# Altium PCB OGS_Headstage_tiny.PcbDoc
Units mil, origin at the board's own origin, x right, y up, seen from the top; angles counter-clockwise.
Board outline 483 x 345 mil, 4 copper layers (Top Layer, Ground 1, Power 2, Bottom Layer), stack 33.1 mil thick; 33 components, 30 nets, 127 pads, 31 vias.
Unrouted connection lines stored in the file: 6.
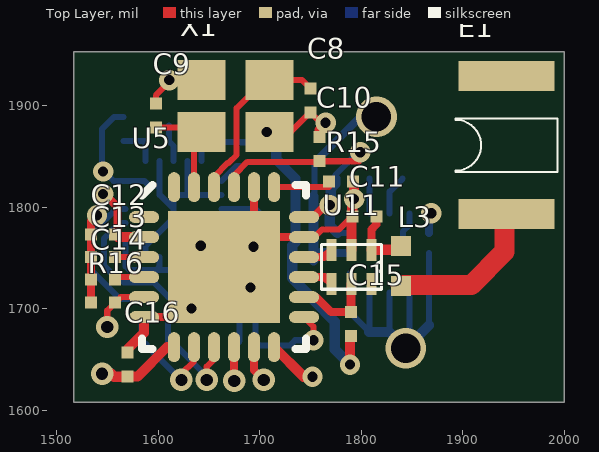
[diagram p0: Top Layer view]
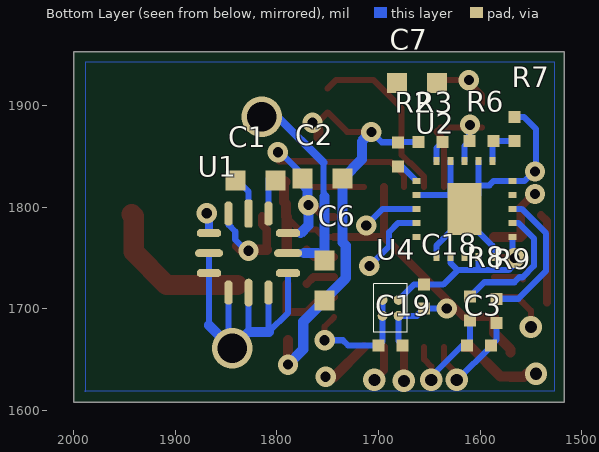
[diagram p1: Bottom Layer view, seen from below]
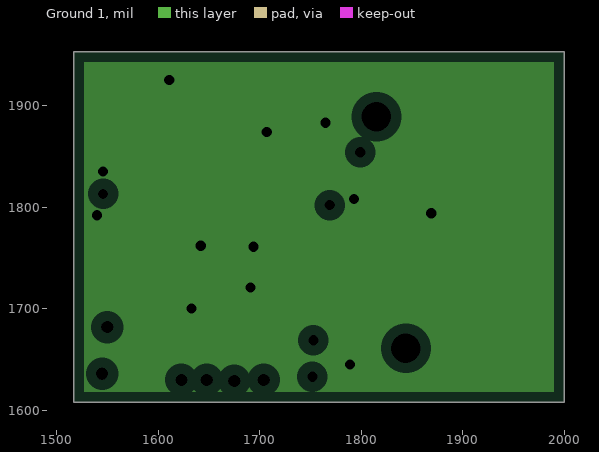
[diagram p2: Ground 1, clearances drawn from the general rule]
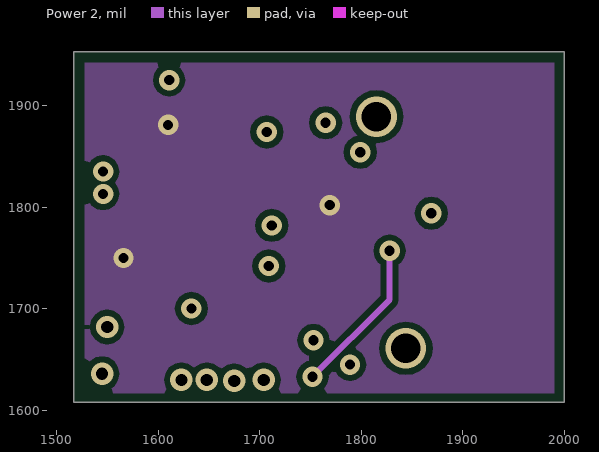
[diagram p3: Power 2]

## Layer stack, top to bottom
Top Layer: signal copper 2.1
Dielectric: core 3.5, FR-4, Dk 4.8
Ground 1: plane copper 1.4, net GND
Dielectric: prepreg 10, FR-4, Dk 4.8
Power 2: signal copper 1.4
Dielectric: core 12.6, FR-4, Dk 4.8
Bottom Layer: signal copper 2.1

## Board outline
1517,1608 1517,1953 2000,1953 2000,1608

## Design rules (kind name [scope] priority, off if disabled: settings)
Clearance clearance1 [All] p1: gap=6
ComponentClearance [All] p1: gap=6 collisioncheckmode=3 verticalgap=0 showdistances=TRUE
Height [All] p1 off: minheight=0 maxheight=1000 prefheight=500
HoleSize [All] p1: absolutevalues=TRUE maxlimit=100 minlimit=10 maxpercent=80.000 minpercent=20.000
HoleToHoleClearance [All] p1: gap=6 allowstackedmicrovias=TRUE
MinimumSolderMaskSliver [All] p1: minsoldermaskwidth=3
PlaneClearance [All] p1: clearance=10
PlaneConnect [All] p1: planeconnectstyle=Direct reliefexpansion=20 reliefentries=4 reliefconductorwidth=10 reliefairgap=10
PolygonConnect PowerConnect [All vs Not OnOutside] p1: connectstyle=Direct reliefconductorwidth=10 reliefentries=4 polygonreliefangle="90 Angle"
PolygonConnect [All] p2: connectstyle=Relief reliefconductorwidth=10 reliefentries=4 polygonreliefangle="90 Angle"
RoomDefinition SingleASIC [InComponentClass('SingleASIC')] p1 off: confinementstyle=ConfineIn formatcopy=TRUE lockcomponents=FALSE outline 2187,484 3662,484 3662,699 2187,699
RoomDefinition Main_4x4 [InComponentClass('Main_4x4')] p2 off: confinementstyle=ConfineIn formatcopy=TRUE lockcomponents=FALSE outline 0,0 2000,0 2000,1000 0,1000
RoomDefinition LED_SOP [InComponentClass('LED_SOP')] p3 off: confinementstyle=ConfineIn formatcopy=TRUE lockcomponents=FALSE outline 2666,913 2951,913 2951,1048 2666,1048
RoutingCorners [All] p1: cornerstyle=45-Degree minsetback=20 maxsetback=20
RoutingVias [All] p1: holewidth=12 width=22 viastyle="Through Hole" minholewidth=12 minwidth=22 maxholewidth=30 maxwidth=50
ShortCircuit [All] p1: allowed=TRUE
SilkscreenOverComponentPads [OnLayer('Mechanical 13') vs OnLayer('Mechanical 15')] p1: minsilkscreentomaskgap=10
SolderMaskExpansion [All] p1: expansion=0
Width Width_v3p0 [InNet('V3P0')] p1: maxlimit=50 minlimit=6 preferedwidth=10
Width [All] p2: maxlimit=30 minlimit=6 preferedwidth=6
18 further rules are at their usual default settings.

## Classes and differential pairs
component class LED_SOP: C1 C2 C6 LED1 U1
component class Main_4x4: C7 C8 C9 C10 C11 C12 C13 C14 C15 C16 C? E1 L3 R15 R16 U5 U11 X1
component class SingleASIC: C3 C18 C19 R2 R3 R6 R7 R8 R9 U2 U4

## Components (designator, comment, footprint, x,y, rotation, side; value= is the part's Value field where it differs from the comment)
C1 "NP0 50V" 0402l 1821,1826 r0 bottom
C2 "NP0 50V" 0402l 1755,1828 r0 bottom
C3 "NP0 50V" 0201 1601,1664 r180 bottom
C6 "NP0 50V" 0402l 1753,1728 r270 bottom
C7 "NP0 50V" 0402l 1662,1922 r180 bottom
C8 "NP0 50V" 0201 1750,1905 r90 top
C9 "NP0 50V" 0201 1598,1890 r90 top
C10 "NP0 50V" 0201 1759,1857 r90 top
C11 "NP0 50V" 0201 1803,1791 r0 top
C12 "NP0 50V" 0201 1546,1773 r180 top
C13 "NP0 50V" 0201 1546,1751 r0 top
C14 "NP0 50V" 0201 1546,1729 r180 top
C15 "NP0 50V" 0201 1790,1685 r270 top
C16 "NP0 50V" 0201 1570,1645 r270 top
C18 "NP0 50V" 0201 1655,1712 r270 bottom
C19 "NP0 50V" 0201 1688,1664 r180 bottom
E1 "MicroAntenna" microantenna 1943,1793 r90 top
L3 "Inductor" 0402l 1839,1742 r270 top
LED1 "osram_hiled" "OSRAM LED" 2202,1715 r270 bottom
R2 "Res2" 0201 1681,1852 r90 bottom
R3 "Res2" 0201 1649,1864 r0 bottom
R6 "Res2" 0201 1598.81,1865 r0 bottom
R7 "Res2" 0201 1566,1877 r270 bottom
R8 "Res2" 0201 1610,1700 r90 bottom
R9 "Res2" 0201 1584,1698 r90 bottom
R15 "Res2" 0201 1780,1825 r0 top
R16 "Res2" 0201 1546,1706 r0 top
U1 "ZLED7022" 12utqfn 1789,1735 r0 bottom
U2 "Single_ASIC" Single_ASIC 1643,1751 r90 bottom
U4 "TPS72715YFFT" "TI YFF WLCSP-4.4" 1696,1693 r90 bottom
U5 "QFN24 4x4 package" NORDIC_QFN50P400X400X90-25N 1665,1741 r0 top
U11 "balun" balun 1810,1758 r270 top
X1 "TSX-3225, 16MHz, Cl=9pF, +/-10ppm" "bt-xtal 2.5 x 2 mm" 1643,1874 r0 top

## Footprints (in the part's own frame and the unit in brackets; to place one, negate y for a bottom-side part, rotate by r counter-clockwise, add the part's x,y. Pads: shape width x height; smd on the part's side, far side on the other; paste and mask are expansions set on the pad)
12utqfn [mm]
  oct 0.6x0.2 smd: 1(0,0) 3(0,-1) 7(1.975,-1) 9(1.975,0)
  oval 0.7x0.2 smd: 2(0,-0.5) 8(1.975,-0.5)
  oct 0.2x0.6 smd: 4(0.487,-1.487) 6(1.487,-1.487) 10(1.487,0.487) 12(0.487,0.487)
  rrect50% 0.2x0.7 smd: 5(0.987,-1.487)
  oval 0.2x0.7 smd: 11(0.987,0.487)
  body extent -0.04,-1.53 2.01,0.52, height 0.6
0201 [mm]
  rect 0.3x0.3 smd: 1(-0.3,0) 2(0.3,0)
  body extent -0.3,-0.15 0.3,0.15, height 0.3
0402l [mm]
  rect 0.5x0.5 smd: 1(-0.5,0) 2(0.5,0)
  body extent -0.5,-0.25 0.5,0.25, height 0.3
balun [mm]
  rect 0.55x0.25 smd: 1(0,0) 2(0,-0.5) 3(0,-1) 4(0.85,-1) 5(0.85,-0.5) 6(0.85,0)
  silkscreen extent -0.14,-1.25 0.99,0.25, body extent -0.14,-1.25 0.99,0.25, height 0.6
"bt-xtal 2.5 x 2 mm" [mm] "Mercury X32 series"
  rect 1.2x1 smd: 1(0,0) 2(1.7,0) 3(1.7,1.3) 4(0,1.3)
  body extent -0.4,-0.35 2.1,1.65, height 0.65
microantenna [mm]
  rect 0.75x2.4 smd: 1(0,0) 2(3.45,0)
  silkscreen extent 1.06,-1.27 2.39,1.27, body extent -0.2,-1.05 3.6,1.05, height 0.6
NORDIC_QFN50P400X400X90-25N [mm] "QFN24 4x4x0.85mm, 0.5mm pitch - Medium Density"
  oval 0.75x0.3 smd: 1(-2,1.25) 2(-2,0.75) 3(-2,0.25) 4(-2,-0.25) 5(-2,-0.75) 6(-2,-1.25) 13(2,-1.25) 14(2,-0.75) 15(2,-0.25) 16(2,0.25) 17(2,0.75) 18(2,1.25)
  oval 0.3x0.75 smd: 7(-1.25,-2) 8(-0.75,-2) 9(-0.25,-2) 10(0.25,-2) 11(0.75,-2) 12(1.25,-2) 19(1.25,2) 20(0.75,2) 21(0.25,2) 22(-0.25,2) 23(-0.75,2) 24(-1.25,2)
  rect 2.8x2.8 smd: 25(0,0)
  silkscreen extent -2.05,-2.05 2.05,2.05, body extent -2.05,-2.05 2.05,2.05, height 0.9
"OSRAM LED" [mm]
  round 2.167 hole 2.067: 0(0,0)
  rect 0.5x1.5 smd: 1(-2.05,0) 2(2.05,0)
Single_ASIC [mm]
  rect 0.152x0.2 smd: 1(0.5,0.5) 2(0.85,0.5) 3(1.2,0.5) 4(1.55,0.5) 5(1.9,0.5) 11(1.9,-1.9) 12(1.55,-1.9) 13(1.2,-1.9) 14(0.85,-1.9) 15(0.5,-1.9)
  rect 0.2x0.152 smd: 6(2.4,0) 7(2.4,-0.35) 8(2.4,-0.7) 9(2.4,-1.05) 10(2.4,-1.4) 16(0,-1.4) 17(0,-1.05) 18(0,-0.7) 19(0,-0.35) 20(0,0)
  rect 1.3x0.85 smd: 21(1.2,-0.7)
"TI YFF WLCSP-4.4" [mm]
  round 0.248 smd: A1(0,0) A2(0.4,0) B1(0,-0.4) B2(0.4,-0.4)
  silkscreen extent -0.41,-0.62 0.8,0.22, body extent -0.41,-0.62 0.8,0.22, height 0.63

## Part data
C1 C2 C3 C6 C7 C8 C9 C10 C11 C12 C13 C14 C15 C16 C18 C19: library part Cap, "Capacitor"
R2 R3 R6 R7 R8 R9 R15 R16: "Resistor"
U1: "ZLED 7022"
U4: "IC REG LDO 250MA 1.5V 4-DSBGA"
U5: library part "nRF24LE1 - 4x4", "2.4GHz Tranceiver with embedded MCU and 10 bit ADC"
X1: library part BT-XTAL, "Crystal"

## Via types
v1: diameter 20, hole 10, Top Layer to Bottom Layer, 12 vias
v2: diameter 22, hole 12, Top Layer to Bottom Layer, 6 vias
v3: diameter 20, hole 10, Power 2 to Bottom Layer, 5 vias
v4: diameter 20, hole 10, Top Layer to Ground 1, 5 vias
v5: diameter 40, hole 29, Top Layer to Bottom Layer, 2 vias
v6: diameter 22, hole 11.8, Top Layer to Bottom Layer, 1 vias

## Nets (pads, with @x,y where several pads share a name; then routed paths per layer and width w, separated by ;. In a path a pad name is that pad's centre, name@x,y a point inside that pad or via, vN(x,y) a via of type N, cw(c..) or ccw(c..) an arc to the next point about the centre after c; other vN are vias at no path point)
ADC+: C3.1 R8.1 U5.9 | length 111.8
  Top Layer w6: v2(1648,1630) 1648,1643 1655.16,1650.16 U5.9
  Bottom Layer w6: R8.1 1610,1666.81 C3.1 1617.28,1664 1648,1633.28 v2(1648,1630)
ADC-: C3.2 R9.1 U5.8 | length 104.2
  Top Layer w6: v2@1623,1636 1635.47,1648.47 U5.8
  Bottom Layer w6: R9.1 1584,1669.19 C3.2 1589.19,1663.08 1622.27,1630 v2(1623,1630)
ELEC: U2.3 | length 56
  Bottom Layer w6: U2.3 1695.76,1798.24 v3(1712,1782)
ELEC_REF: U2.2 | length 72.1
  Bottom Layer w6: U2.2 1680.54,1784.46 1689.5,1775.5 1689.5,1761.5 v3(1709,1742)
FCSN: U5.11 | length 36.2
  Top Layer w8: U5.11 1694.53,1639.47 v2(1704,1630)
FMISO: U5.10 | length 33.3
  Top Layer w8: U5.10 1674.84,1629.16 v2(1675,1629)
GND: C2.1 C6.2 C8.1 C9.2 C10.2 C11.1 C12.2 C13.1 C14.2 C15.2 C16.1 C18.2 C19.2 R2.2 R3.2 R7.1 R15.2 R16.1 U1.7 U2.4 U2.7 U2.9 U2.11 U2.16 U2.20 U2.21 U4.B1 U5.6 U5.17 U5.20 U5.25 U11.2 X1.2 X1.4 | length 1461.6
  Top Layer w6: C9.2 1598,1910 1613.18,1925.18 X1.4 ; X1.2 1730.81,1874 C8.1 1760.19,1883 v1(1765,1883) ; U5.17 1753.99,1770.53 1761.29,1777.83 1778.02,1777.83 1790.32,1790.13 C11.1
  Top Layer w8: R16.1 C14.2 C13.1 C12.2 1534.19,1786.19 v4(1540,1792) ; U5.6 1615.79,1691.79 U5.25 U5.25@1694.53,1770.53 ; U5.20 U5.25@1694.53,1770.53 ; U5.17 U5.25@1694.53,1770.53
  Top Layer w10: C16.1 1570,1660 1586.26,1676.26 U5.6 ; C10.2 1759,1875.81 v1@1763.19,1880 ; v1@1764.7,1880 v1@1763.19,1880 ; v1@1765,1881.81 v1@1763.19,1880 ; v1(1789,1645) C15.2@1789,1669.19 ; U11.2 C11.1@1790.32,1790.13 ; C11.1 1791.19,1803.19 v4@1793,1805 ; R15.2 1793,1823.81 v4(1793,1808)
  Bottom Layer w6: R7.1 1556.81,1888.81 1545,1877 1545,1837 1556.2,1825.8 U2.11 1586.54,1825.8 1591,1821.34 U2.21@1601.66,1821.34 ; U2.16 1587.88,1762.16 U2.21@1615.44,1789.72 ; U2.9 U2.21@1601.66,1821.34 ; U2.7 U2.21@1629.22,1812.02 ; v1@1630,1703 v1(1632.81,1700.19) C18.2 1662.19,1693 U4.B1 1680.25,1668.06 C19.2 ; U2.20 1643,1762 1615.44,1789.56 U2.21@1615.44,1789.72 ; R3.2 1680.81,1864 R2.2 1696.81,1863.81 v1(1707,1874) ; U2.4 U2.21@1629.22,1812.02 ; U2.21@1601.66,1821.34 1601.66,1812.02 U2.21 ; U2.21@1615.44,1789.72 U2.21 ; U2.21 1615.44,1812.02 U2.21@1629.22,1812.02
  Bottom Layer w8: U1.7 1866.76,1788.76 v1@1869,1791
  Bottom Layer w10: v1(1707,1874) 1716.32,1864.68 1716.32,1847 C2.1 1735.32,1765.24 1732.16,1762.08 1732.16,1730.13 1753,1709.29 C6.2 1774,1687.32 1774,1660 v1(1789,1645)
  other v1: 1869,1794 1546,1835 1611,1925
  other v4: 1691,1721 1694,1761 1642,1762
LED_CTRL: U1.6 U5.12 | length 245
  Top Layer w10: U5.12 1743.47,1633 v1(1752,1633)
  Power 2 w6: v1(1752,1633) 1828,1709 v3(1828,1757)
  Bottom Layer w6: v3@1833,1760 1841,1768 1841,1776 1847.56,1782.56 U1.6
NetC1_1: C1.1 U1.4 | length 34.4
  Bottom Layer w6: U1.4 C1.1@1808.19,1828
NetC1_2: C1.2 U1.5 | length 39.7
  Bottom Layer w6: U1.5 1827.88,1815.19 C1.2@1840.68,1828
NetC8_2: C8.2 U5.22 X1.3 | length 175
  Top Layer w6: U5.22 1655.16,1829.99 1668.67,1843.5 1669.5,1843.5 1677.31,1851.31 1677.31,1897.41 1705.08,1925.18 X1.3 1741.63,1925.18 C8.2
NetC9_1: C9.1 U5.23 X1.1 | length 104.1
  Top Layer w6: C9.1 1638.81,1878.19 X1.1 1635.47,1866.47 U5.23
NetC11_2: C11.2 L3.1 U11.1 | length 65.5
  Top Layer w8: U11.1 1810,1778 1814.81,1782.81 C11.2
  Top Layer w10: U11.1 1835.32,1758 L3.1
NetC13_2: C13.2 U5.3 | length 28.5
  Top Layer w6: C13.2 1557.97,1750.84 U5.3
NetC14_1: C14.1 U5.4 | length 29.3
  Top Layer w6: C14.1 1559.97,1731.16 U5.4
NetC15_1: C15.1 U5.14 U11.5 | length 79.7
  Top Layer w8: U5.14 1755.53,1711.47 1770.19,1696.81 C15.1
  Top Layer w9: C15.1 U11.5@1790,1724.22
NetE1_1: E1.1 L3.2 | length 153.4
  Top Layer w20: L3.2@1839,1723.32 1908.32,1723.32 1941,1756 1941,1791 E1.1
NetLED1_1: LED1.1 U1.1 U1.8 U1.9 U1.10 U1.11 U1.12 | length 340.5
  Bottom Layer w6: U1.1 1789,1696 1807.88,1677.12 ; 1808.19,1676.81 U1.12 ; 1827.88,1677.12 U1.11 ; v5(1844,1661) 1847.56,1664.56 U1.10 ; 1866.76,1683.76 U1.9 U1.8
  Bottom Layer w10: 1807.88,1677.12 1827.88,1677.12 v5(1844,1661) ; v5@1847.56,1664.56 1866.76,1683.76
NetR2_1: R2.1 U2.5 | length 24.3
  Bottom Layer w6: U2.5 1677.07,1840.19 R2.1
NetR3_1: R3.1 U2.6 | length 20.9
  Bottom Layer w6: R3.1 1643,1858.19 U2.6
NetR6_1: R6.1 R7.2 U2.10 | length 41
  Bottom Layer w6: R7.2 1566.19,1865 R6.1 1587.88,1864.12 U2.10
NetR8_2: R8.2 U2.14 | length 130.1
  Bottom Layer w6: U2.14 1562.31,1784.46 1547,1769.15 1547,1742.13 1558.13,1731 1561.35,1731 1566.28,1726.06 1595.75,1726.06 R8.2
NetR9_2: R9.2 U2.13 | length 140.5
  Bottom Layer w6: U2.13 1559.12,1798.24 1535,1774.12 1535,1737.16 1562.35,1709.81 R9.2
NetR15_1: R15.1 U5.19 | length 54
  Top Layer w6: U5.19 R15.1@1768.19,1819.74
NetR16_2: R16.2 U5.5 | length 56
  Top Layer w6: v2@1550,1684 1550,1698.19 R16.2 1563.28,1711.47 U5.5
  other v2: 1550,1682
NetU5_15: U5.15 U11.4 | length 29.6
  Top Layer w8: U5.15 1764.01,1731.16 U11.4
NetU5_16: U5.16 U11.3 | length 29.9
  Top Layer w8: U5.16 1763.47,1750.84 U11.3
V1P5: C18.1 R6.2 U2.8 U2.15 U2.17 U2.19 U4.B2 | length 221.8
  Bottom Layer w6: U2.15 1568.2,1741.8 1571.94,1738.06 1598.06,1738.06 ; U2.17 1601.66,1741.66 1598.06,1738.06 ; v3@1610.62,1880.38 R6.2 1615.44,1860.18 U2.8 ; U2.19 1629.22,1745.11 1622.17,1738.06 ; U4.B2 1665.19,1723.81 C18.1 1636.42,1723.81 1622.17,1738.06 ; 1598.06,1738.06 1622.17,1738.06
  other v3: 1566,1750 1610,1881
V3P0: C2.2 C7.1 C10.1 C12.1 C16.2 C19.1 U1.3 U4.A1 U4.A2 U5.2 U5.7 U5.13 U5.18 U5.21 | length 559.7
  Top Layer w6: U5.21 1674.84,1831.41 1687.94,1844.5 1753.68,1844.5 C10.1@1754.19,1844 ; U5.13 1753,1682.53 v1(1753,1669) ; C10.1 v1@1797.81,1845.19
  Top Layer w8: v1(1546,1813) 1547.28,1813 1560,1800.28 1560,1775.19 C12.1 ; U5.18 1753.21,1790.21 v1@1765,1802
  Top Layer w10: v2(1545,1636) 1554,1636 1557,1633 1569.81,1633 C16.2 1579.81,1633.19 1608.88,1662.26 U5.7 ; C12.1 1560.28,1770.53 U5.2
  Bottom Layer w6: U4.A2 U4.A1 1696,1667.81 C19.1 1730,1664 1735,1669 v1(1753,1669) ; C2.2 1774.68,1831.78 1796.9,1854 v1(1799,1854) ; 1776.63,1774.37 U1.3
  Bottom Layer w10: C2.2 1774.68,1822.76 1770,1818.07 1770,1804.82 1769,1803.82 v1(1769,1802) 1769,1782 1776.63,1774.37
VOUT: C6.1 LED1.2 U1.2 | length 205.3
  Bottom Layer w6: 1753,1810.44 1753,1813.27 1754.16,1814.43 1754.16,1844
  Bottom Layer w8: 1754.16,1844 1754.28,1844 1799.28,1889 v5(1815,1889) ; 1773,1754.68 U1.2
  Bottom Layer w10: C6.1 1753,1810.44 ; C6.1@1760,1754.68 1773,1754.68
pads on no net: C7.2 E1.2 LED1.0 U2.1 U2.12 U2.18 U5.1 U5.24 U11.6
copper on no net:
  other v6: 1916,1265

## Polygon pours and split planes (outlines as drawn)
GND on Bottom Layer "Bottom-GND" (solid, shelved, pour order 4): 1527,1943 1527,1619 1989,1619 1988,1619 1988,1943
no net on Bottom Layer "Top Layer-No Net" (solid, shelved, pour order 14): 1278,2068 1278,1235 1279.05,1234 2079.95,1234 2081,1233 2081,2063.01 1282.2,2063.01 1279.05,2066
no net on Top Layer "Top Layer-No Net" (solid, shelved, pour order 12): 1275.65,2067 1275.65,1248.45 1264,1237 2062.35,1237 2062.35,2055.55 2074,2067 1275.65,2067
V1P5 on Power 2 "Power" (solid, pour order 5): 1528,1942 1528,1617 1990,1617 1990,1942
GND on Ground 1 (split plane): 1989.91,1618.09 1527.09,1618.09 1527.09,1942.91 1989.91,1942.91

## Other copper
Top Layer:
  pour cut-out: 1784,2066 1785,2065 1785,2003 1787,2003 1857,1933 1857,1811 1887,1781 1887,1643 1923.67,1606.33 2086,1606.33 2086,2045.79 2067.48,2064.3 2067.48,2067 2059,2067 2058,2068 2057,2067 1785,2067
Bottom Layer:
  pour cut-out: 1793,2099 1794,2098 1794,2036 1796,2036 1866,1966 1866,1844 1896,1814 1896,1676 1932.67,1639.33 2107,1639.33 2107,2104.88 2068,2100 2067,2101 2066,2100 1794,2100

## Silkscreen, mask and mechanical layers (free items; w line width, h text height)
Mechanical 2:
  the board outline again, w10